# Altium PCB ZYNQ-HS-DEV-PCB.PcbDoc (part 12 of 13)
Units mm, origin at the board's own origin, x right, y up, seen from the top; angles counter-clockwise.
Board outline 125.73 x 111.93 mm, 10 copper layers (S1 (SIG), S2 (GND), S3 (SIG), S4 (GND), S5 (PWR), S6 (SIG), S7 (GND), S8 (SIG), S9 (GND), S10 (SIG)), stack 1.597 mm thick; 545 components, 400 nets, 2449 pads, 1577 vias.
Unrouted connection lines stored in the file: 309.
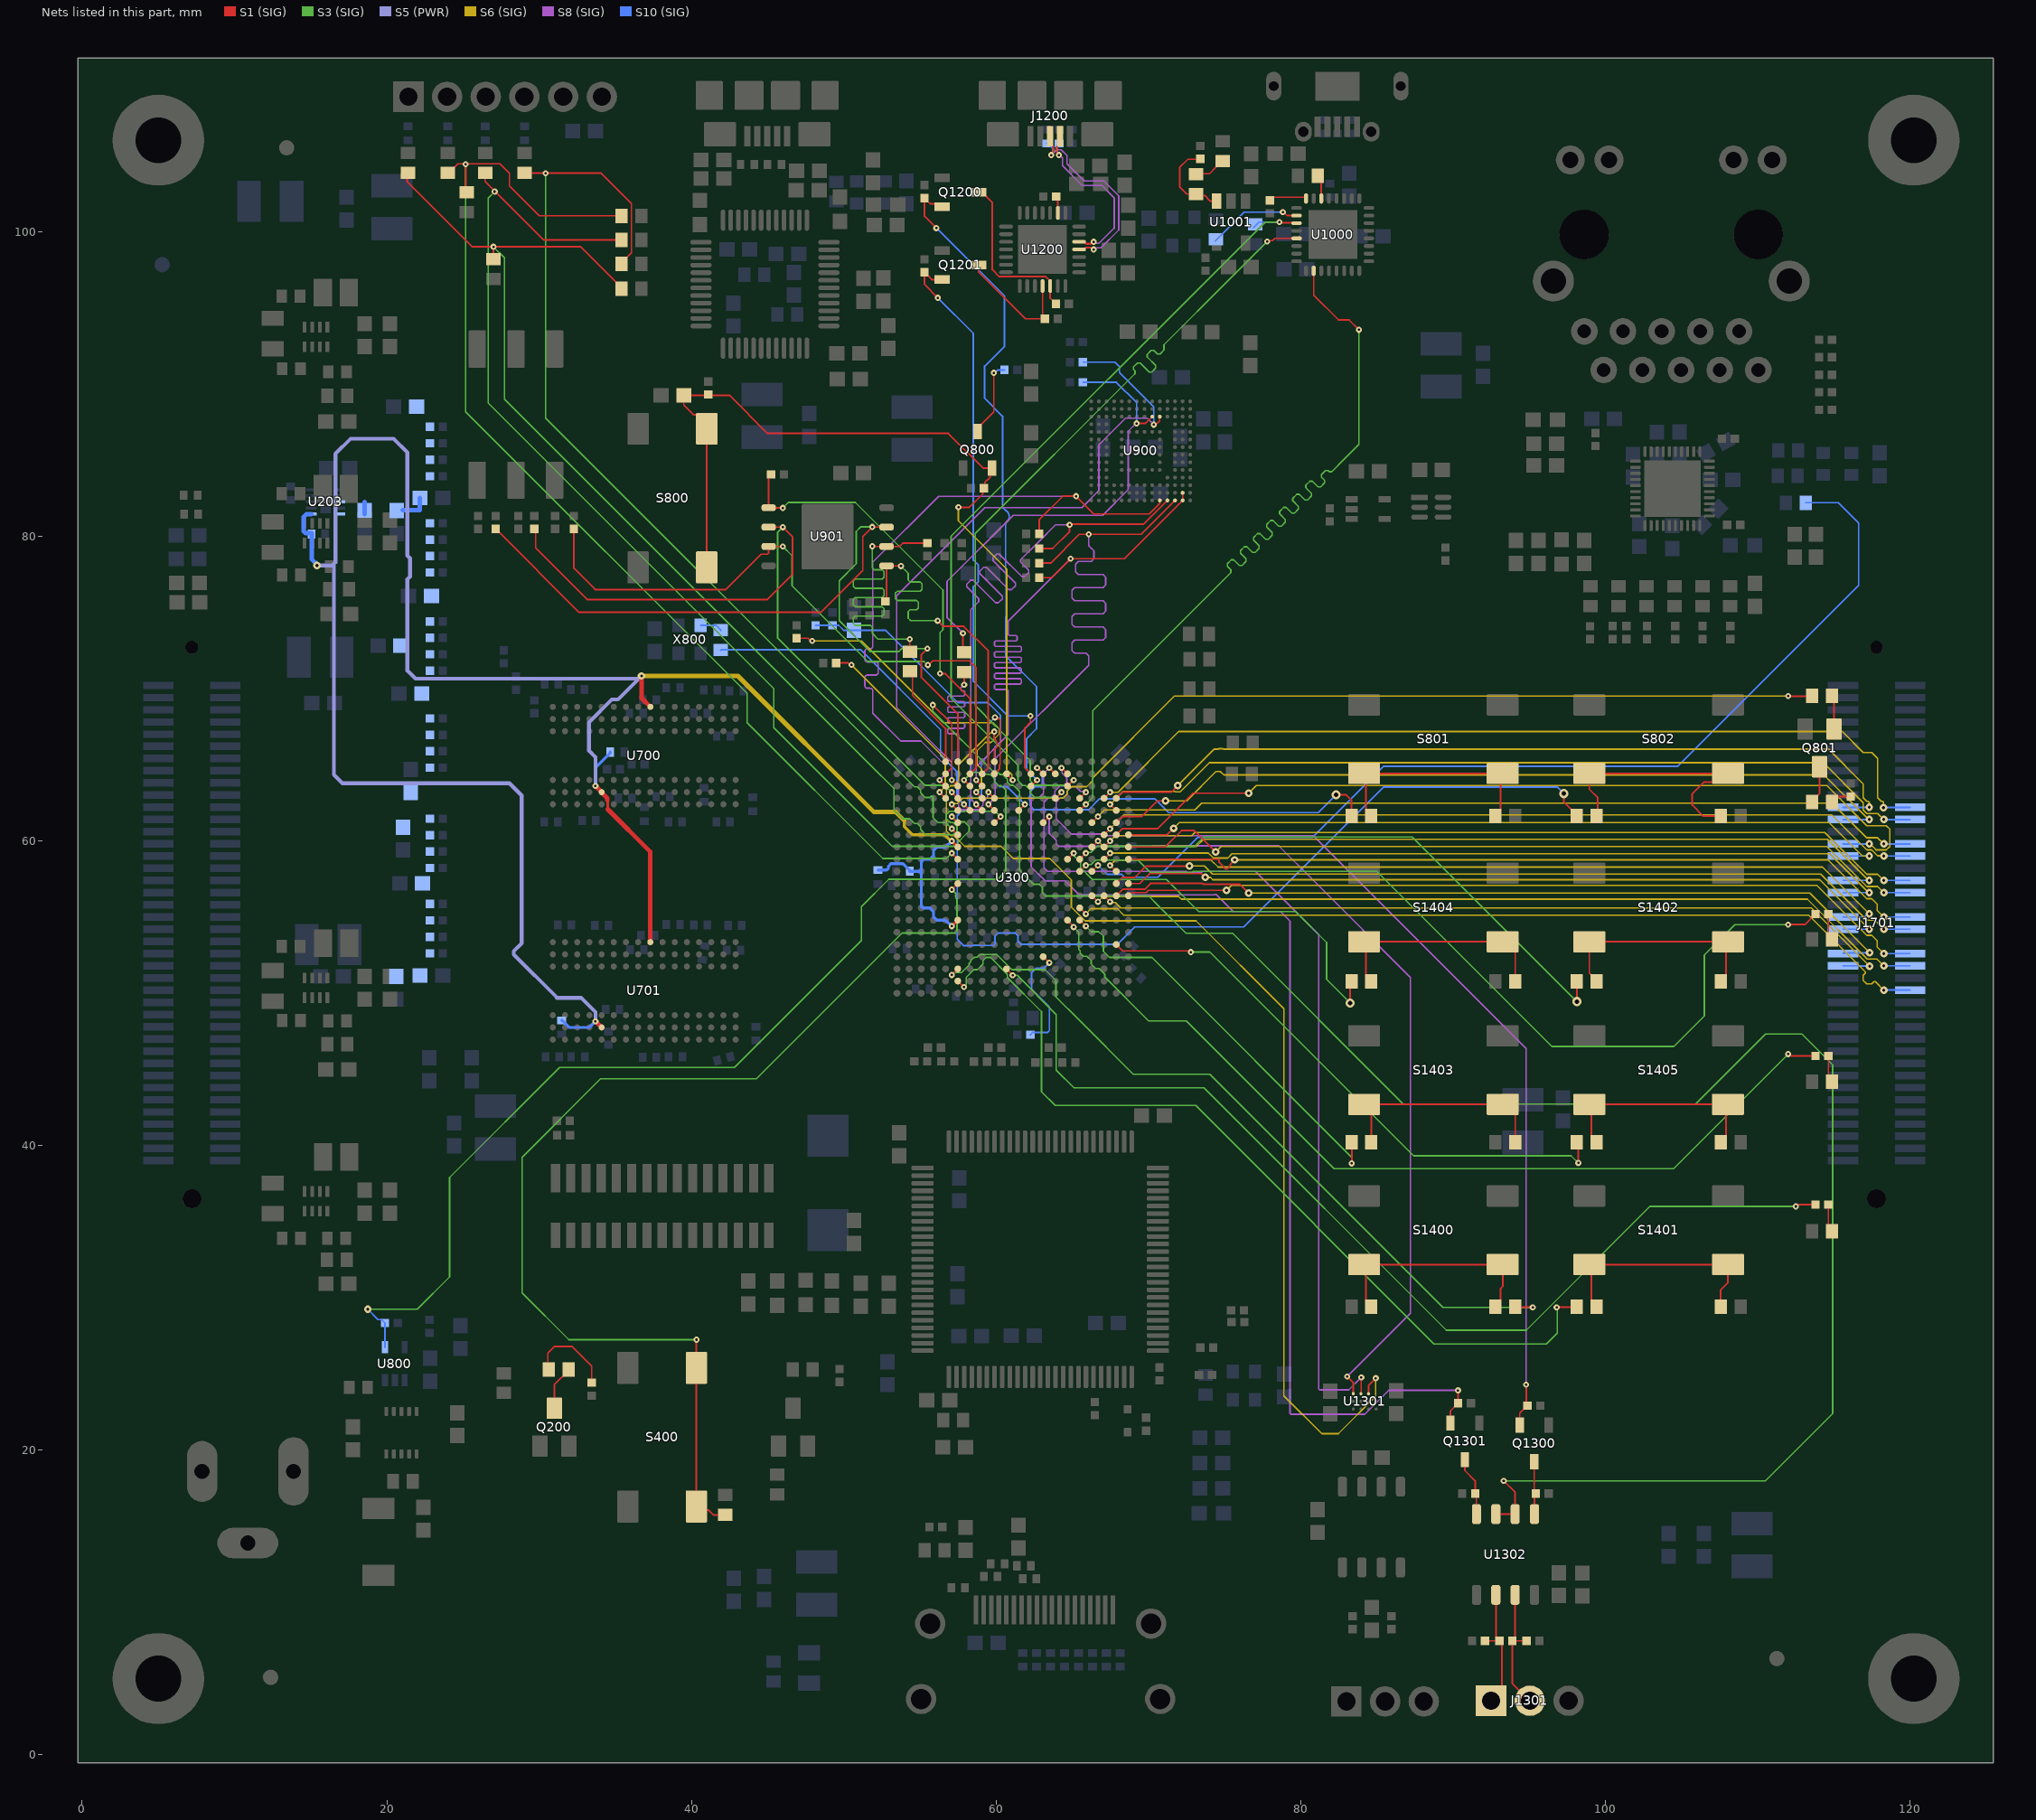
[diagram p19: the nets of this part, all layers, seen from the top]

## Via types
v1: diameter 0.4, hole 0.15, S1 (SIG) to S10 (SIG), tented both sides, 892 vias
v2: diameter 0.5, hole 0.2, S1 (SIG) to S10 (SIG), tented both sides, 231 vias
v3: diameter 0.6, hole 0.3, S1 (SIG) to S10 (SIG), tented both sides, 188 vias
v4: diameter 1, hole 0.5, S1 (SIG) to S10 (SIG), tented both sides, 158 vias
v5: diameter 0.5, hole 0.25, S1 (SIG) to S10 (SIG), tented both sides, 108 vias

## Nets (pads, with @x,y where several pads share a name; then routed paths per layer and width w, separated by ;. In a path a pad name is that pad's centre, name@x,y a point inside that pad or via, vN(x,y) a via of type N, cw(c..) or ccw(c..) an arc to the next point about the centre after c; other vN are vias at no path point) (continued)
OTG_NXT: U300.E16 U1000.2 | length 53.7
  S1 (SIG) w0.11: U300.E16@65.488,61.995 v1(65.888,62.395) ; U1000.2@80.85,97.4 80.85,95.825 82.475,94.2 83.175,94.2 v1(83.825,93.55)
  S3 (SIG) w0.1: v1(65.888,62.395) 66.338,62.845 66.338,68.538 75.379,77.579 75.414,77.614 75.414,77.786 75.178,78.021 75.178,78.193 75.436,78.451 75.608,78.451 75.976,78.084 76.148,78.084 76.406,78.342 76.406,78.514 76.038,78.881 76.038,79.053 76.296,79.311 76.468,79.311 76.836,78.943 77.008,78.943 77.266,79.201 77.266,79.373 76.898,79.741 76.898,79.913 77.156,80.171 77.328,80.171 77.696,79.803 77.868,79.803 78.126,80.061 78.126,80.233 77.758,80.601 77.758,80.773 78.016,81.031 78.188,81.031 78.556,80.663 78.728,80.663 78.985,80.921 78.985,81.093 78.618,81.461 78.618,81.633 78.876,81.891 79.048,81.891 79.415,81.523 79.587,81.523 79.845,81.781 79.845,81.953 79.478,82.321 79.478,82.493 79.736,82.75 79.908,82.75 80.275,82.383 80.447,82.383 80.705,82.641 80.705,82.813 80.338,83.18 80.338,83.352 80.595,83.61 80.767,83.61 81.135,83.243 81.307,83.243 81.565,83.501 81.565,83.673 81.365,83.873 81.365,84.045 81.623,84.303 81.795,84.303 81.863,84.235 82.035,84.235 82.874,85.074 83.825,86.025 v1(83.825,93.55)
OTG_OC_LED: D1003.1 R1004.1 | length 2.1
  S1 (SIG) w0.11: D1003.1@73.125,103.8 74.015,103.8 74.455,104.24 74.455,104.28 74.8,104.625 R1004.1@74.875,104.625
OTG_RBIAS: R1005.2 U1000.24 | length 2.5
  S1 (SIG) w0.11: R1005.2@77.975,102.05 78.175,102.25 80.285,102.25 80.35,102.185 U1000.24@80.35,102.175
OTG_RCLK: R1002.1 U1000.26 | length 6.2
  S1 (SIG) w0.11: v1(78.825,101.275) 78.891,101.275 79.116,101.05 79.7,101.05 U1000.26@79.713,101.037
  S10 (SIG) w0.11: R1002.1@74.376,99.375 76.276,101.275 v1(78.825,101.275)
OTG_RST: R1001.1 U300.D14 U1000.27 | length 55.1
  S1 (SIG) w0.11: U300.D14@63.888,62.795 v1(64.288,63.195) ; v1(78.6,100.625) 78.648,100.577 79.673,100.577 U1000.27@79.713,100.537
  S3 (SIG) w0.1: v1(64.288,63.195) 63.938,62.845 62.543,62.845 62.265,63.123 62.265,63.313 61.946,63.631 61.756,63.631 61.438,63.95 61.438,64.965 57.05,69.352 57.05,80 77.675,100.625 v1(78.6,100.625)
  S10 (SIG) w0.11: R1001.1@76.875,100.25 77.25,100.625 v1(78.6,100.625)
OTG_STP: U300.C15 U1000.29 | length 53.1
  S1 (SIG) w0.11: U300.C15@64.688,63.595 v1(65.088,63.995) ; v1(77.8,99.35) 77.856,99.405 78.151,99.405 78.295,99.55 U1000.29@79.7,99.55
  S3 (SIG) w0.1: v1(65.088,63.995) 64.738,63.645 62.543,63.645 62.238,63.95 62.238,65.262 60.225,67.275 60.225,67.32 60.02,67.525 59.975,67.525 58.625,68.875 58.625,80.175 69.088,90.637 69.123,90.673 69.123,90.845 69.024,90.944 69.024,91.116 69.282,91.373 69.454,91.373 70.048,90.779 70.22,90.779 70.478,91.037 70.478,91.209 69.922,91.766 69.922,91.938 70.18,92.196 70.352,92.196 70.585,91.963 70.757,91.963 71.015,92.221 71.015,92.393 71.015,92.564 75.338,96.887 v1(77.8,99.35)
OTG_SW_OCN: D1003.2 R1003.2 U1001.3 | length 5.7
  S1 (SIG) w0.11: R1003.2@73.4,104.775 73.367,104.742 72.592,104.742 72.05,104.2 72.05,102.925 72.509,102.466 D1003.2@73.125,102.466 73.225,102.365 73.7,102.365 74.066,102 U1001.3@74.475,102
OTG_VBUS: R1000.1 U1000.22 | length 1.6
  S1 (SIG) w0.11: R1000.1@81.125,103.675 81.35,103.45 U1000.22@81.35,102.175
PG_ALL_LA: D201.1 R210.1 | length 5.8
  S1 (SIG) w0.11: D201.1@30.625,25.3 30.575,25.35 30.575,26.375 31,26.8 32.175,26.8 33.45,25.525 R210.1@33.45,24.425
PG_ALL_LK: D201.2 Q200.3 | length 2.9
  S1 (SIG) w0.11: Q200.3@31,22.745 31,24.3 31.925,25.225 D201.2@31.925,25.3
PL13_BTN_1: R1403.2 U300.V6 | length 50.8
  S1 (SIG) w0.11: v1(57.088,51.195) U300.V6@57.488,51.595 ; R1403.2@94.083,29.408 94.116,29.375 v1(95.225,29.375)
  S3 (SIG) w0.1: v1(57.088,51.195) 57.238,51.345 57.733,51.345 58.238,51.85 58.238,51.971 58.338,52.071 58.338,52.14 58.543,52.345 58.612,52.345 58.627,52.36 58.748,52.36 58.933,52.545 60.043,52.545 61.043,51.545 63.213,51.545 63.925,50.833 63.925,49.755 65.48,48.2 69,44.68 74.026,44.68 89.331,29.375 v1(95.225,29.375)
PL13_BTN_1_SW: R1403.1 R1405.1 S1400.1 S1400.2 | length 15
  S1 (SIG) w0.11: R1405.1@84.633,29.408 84.288,29.753 84.288,32.053 S1400.1@84.158,32.183 S1400.2@93.258,32.183 93.258,30.749 93.128,30.619 93.128,29.753 R1403.1@92.783,29.408
PL13_BTN_2: R1404.2 U300.W6 | length 57.8
  S1 (SIG) w0.11: U300.W6@57.488,50.795 v1(57.888,50.395) ; v1(96.8,29.375) 98.088,29.375 R1404.2@98.122,29.408
  S3 (SIG) w0.1: v1(57.888,50.395) 58.038,50.545 58.038,51.04 58.543,51.545 58.765,51.545 59.138,51.917 59.138,52.14 59.343,52.345 59.633,52.345 60.738,51.24 60.738,51.02 62.975,48.783 62.975,48.2 62.975,43.525 63.875,42.625 73.1,42.625 88.75,26.975 96.125,26.975 96.834,27.684 96.834,29.341 v1(96.8,29.375)
PL13_BTN_2_SW: R1404.1 R1406.1 S1401.1 S1401.2 | length 15
  S1 (SIG) w0.11: R1404.1@99.422,29.408 99.077,29.753 99.077,32.053 S1401.1@98.947,32.183 S1401.2@108.047,32.183 108.047,30.995 107.572,30.52 R1406.1@107.572,29.408
PL13_LED: R1401.2 U300.V10 | length 68.5
  S1 (SIG) w0.11: U300.V10@60.688,51.595 60.688,51.58 61.088,51.18 v1(61.088,51.165) ; v1(112.5,36) 112.578,36 112.697,36.118 R1401.2@113.79,36.118
  S3 (SIG) w0.1: v1(61.088,51.165) 61.385,51.165 63.95,48.6 63.95,48.2 63.95,44.947 65.117,43.78 73.653,43.78 89.558,27.875 94.805,27.875 102.93,36 v1(112.5,36)
PL13_LED_A: D1400.1 R1401.1 | length 1.8
  S1 (SIG) w0.11: R1401.1@114.64,36.118 114.64,34.593 D1400.1@114.865,34.368
PL34_BTN_1: R1409.2 U300.P16 | length 26.7
  S1 (SIG) w0.11: U300.P16@65.488,54.795 v1(65.888,54.395) ; R1409.2@83.333,40.2 83.35,40.183 v1(83.35,38.825)
  S3 (SIG) w0.1: v1(65.888,54.395) 66.244,54.039 66.739,54.039 67.041,53.737 67.041,52.747 67.443,52.345 70.23,52.345 70.65,51.925 83.35,39.225 v1(83.35,38.825)
PL34_BTN_1_SW: R1409.1 R1414.1 S1403.1 S1403.2 | length 14.7
  S1 (SIG) w0.11: R1409.1@84.633,40.2 84.633,42.225 S1403.1@84.158,42.7 S1403.2@93.258,42.7 93.439,42.7 94.083,42.056 R1414.1@94.083,40.2
PL34_BTN_2: R1411.2 U300.T19 | length 37.7
  S1 (SIG) w0.11: U300.T19@67.888,53.195 68.307,52.775 72.567,52.775 72.589,52.754 72.721,52.754 v1(72.777,52.698) ; R1411.2@98.122,40.2 98.225,40.097 v1(98.225,38.85)
  S3 (SIG) w0.1: v1(72.777,52.698) 74.032,52.698 87.405,39.325 97.75,39.325 v1(98.225,38.85)
PL34_BTN_2_SW: R1411.1 R1415.1 S1405.1 S1405.2 | length 14.5
  S1 (SIG) w0.11: R1411.1@99.422,40.2 99.077,40.545 99.077,42.57 S1405.1@98.947,42.7 S1405.2@108.047,42.7 107.917,42.57 107.917,40.545 R1415.1@107.572,40.2
PL34_LED: R1407.2 U300.P15 | length 60.1
  S1 (SIG) w0.11: U300.P15@64.688,54.795 64.688,54.765 65.087,54.365 v1(65.087,54.335) ; v1(112,46) 112.078,46 112.203,45.875 R1407.2@113.79,45.875
  S3 (SIG) w0.1: v1(65.087,54.335) 65.431,53.992 65.431,52.869 65.511,52.789 65.511,52.624 65.716,52.419 65.959,52.419 66.244,52.133 66.244,51.917 66.536,51.625 66.752,51.625 67.138,51.24 67.138,51.05 70.012,48.175 72.483,48.175 82.183,38.475 104.475,38.475 v1(112,46)
PL34_LED_A: D1402.1 R1407.1 | length 1.8
  S1 (SIG) w0.11: R1407.1@114.64,45.875 114.64,44.425 D1402.1@114.865,44.2
PL34_PUDCB: R1400.2 U300.U13 | length 7.6
  S1 (SIG) w0.11: U300.U13@63.088,52.395 v1(63.488,51.995)
  S10 (SIG) w0.11: R1400.2@62.246,47.265 62.405,47.424 63.387,47.424 63.501,47.538 63.501,49.095 62.333,50.263 62.333,51.342 62.631,51.641 63.133,51.641 v1(63.488,51.995)
PL35_BTN_1: R1408.2 U300.J16 | length 39
  S1 (SIG) w0.11: U300.J16@65.488,58.795 v1(65.888,59.195) ; R1408.2@98.122,50.775 98.122,49.453 v3(98.125,49.45)
  S3 (SIG) w0.1: v1(65.888,59.195) 65.933,59.24 66.238,59.24 66.643,59.645 73.02,59.645 73.625,60.25 87.325,60.25 v3(98.125,49.45)
PL35_BTN_1_SW: R1408.1 R1412.1 S1402.1 S1402.2 | length 14.7
  S1 (SIG) w0.11: R1408.1@99.422,50.775 99.422,50.85 98.947,51.325 S1402.1@98.947,53.375 S1402.2@108.047,53.375 107.917,53.245 107.917,51.12 R1412.1@107.572,50.775
PL35_BTN_2: R1410.2 U300.J15 | length 26
  S1 (SIG) w0.11: U300.J15@64.688,58.795 v1(65.088,59.195) ; v3(83.25,49.35) 83.25,50.692 R1410.2@83.333,50.775
  S3 (SIG) w0.1: v1(65.088,59.195) 65.145,59.137 65.145,58.98 65.538,58.587 65.538,58.25 66.325,57.462 71.188,57.462 73.3,55.35 79.675,55.35 81.7,53.325 81.7,50.9 v3(83.25,49.35)
PL35_BTN_2_SW: R1410.1 R1413.1 S1404.1 S1404.2 | length 14.9
  S1 (SIG) w0.11: R1410.1@84.633,50.775 84.288,51.12 84.288,53.245 S1404.1@84.158,53.375 S1404.2@93.258,53.375 93.439,53.375 94.083,52.731 R1413.1@94.083,50.775
PL35_LED: R1402.2 U300.K16 | length 59.7
  S1 (SIG) w0.11: U300.K16@65.488,57.995 v1(65.888,58.395) ; v1(112,54.5) 113.094,54.5 R1402.2@113.79,55.196
  S3 (SIG) w0.1: v1(65.888,58.395) 65.933,58.44 66.238,58.44 66.543,58.745 69.304,58.745 70.104,57.945 72.866,57.945 72.921,58 84.986,58 96.486,46.5 104.5,46.5 106.5,48.5 106.5,52.5 108.5,54.5 v1(112,54.5)
PL35_LED_A: D1401.1 R1402.1 | length 1.8
  S1 (SIG) w0.11: R1402.1@114.64,55.196 114.64,53.746 D1401.1@114.865,53.521
PL_CLK_125: R1121.2 U300.K17 | length 66.9
  S1 (SIG) w0.11: U300.K17@66.288,57.995 v1(66.688,58.395)
  S10 (SIG) w0.11: v1(66.688,58.395) 67.28,57.802 68.241,57.802 68.436,57.607 70.607,57.607 73.225,60.225 80.775,60.225 85.45,64.9 104.75,64.9 116.625,76.775 116.625,80.875 115.3,82.2 R1121.2@113.15,82.2
PROGRAM_B_0: R403.1 S400.3 S400.4 U300.L6 | length 72.8
  S1 (SIG) w0.11: v1(40.325,27.25) S400.3@40.325,25.4 S400.4@40.325,16.3 40.569,16.056 41.126,16.056 41.432,15.75 R403.1@42.225,15.75 ; v1(57.088,56.795) U300.L6@57.488,57.195
  S3 (SIG) w0.1: v1(40.325,27.25) 31.95,27.25 28.875,30.325 28.875,39.225 34.025,44.375 44.26,44.375 51.9,52.015 53.83,53.945 57.291,53.945 57.438,54.091 57.438,56.14 57.35,56.227 57.35,56.532 v1(57.088,56.795)
PS_1V8MODE: R808.2 U300.D5 | length 12.7
  S1 (SIG) w0.11: R808.2@49.5,71.675 50.297,71.675 50.422,71.55 v1(50.5,71.55) ; v1(56.288,63.195) U300.D5@56.688,62.795
  S6 (SIG) w0.1: v1(50.5,71.55) 56.663,65.387 56.663,63.57 v1(56.288,63.195)
PS_3V3MODE: R807.2 U300.D8 | length 21.6
  S1 (SIG) w0.11: R807.2@46.9,73.3 47.672,73.3 47.847,73.125 v1(47.925,73.125) ; v1(58.688,63.195) U300.D8@59.088,62.795
  S6 (SIG) w0.1: v1(47.925,73.125) 51.155,73.125 56.53,67.75 59.795,67.75 60.225,67.32 60.225,67.03 59.663,66.468 59.3,66.468 58.738,65.905 58.738,65.028 59.038,64.728 59.038,63.545 v1(58.688,63.195)
PS_BTN_1: R821.2 U300.B13 | length 27.3
  S1 (SIG) w0.11: v1(62.688,64.795) U300.B13@63.088,64.395 ; v3(82.325,63.025) 82.95,63.025 83.333,62.642 R821.2@83.333,61.625
  S10 (SIG) w0.11: v1(62.688,64.795) 63.043,64.44 63.043,63.658 62.93,63.545 62.839,63.545 62.835,63.55 62.541,63.55 62.243,63.252 62.243,62.297 62.5,62.04 66.065,62.04 66.775,62.75 70.427,62.75 71.327,61.85 81.15,61.85 v3(82.325,63.025)
PS_BTN_2: R822.2 U300.B9 | length 67.6
  S1 (SIG) w0.11: U300.B9@59.888,64.395 60.23,64.738 60.23,65 60.268,65.037 60.268,67.943 60.166,68.045 59.98,68.045 v1(59.925,68.1) ; v3(97.275,63.1) 97.275,62.547 98.122,61.7 R822.2@98.122,61.625
  S10 (SIG) w0.11: v1(59.925,68.1) 59.488,67.663 59.488,65.607 59.02,65.139 59.02,64.164 59.043,64.142 59.043,63.048 58.796,62.801 58.336,62.801 58.271,62.737 58.271,62.276 57.957,61.962 57.753,61.962 57.445,61.654 57.445,53.535 57.855,53.125 58.516,53.125 58.541,53.15 58.835,53.15 58.851,53.133 59.842,53.133 59.925,53.216 59.925,53.734 60.141,53.95 61.235,53.95 61.443,53.742 61.443,53.388 61.617,53.214 67.979,53.214 69.116,54.35 76.267,54.35 85.447,63.53 96.845,63.53 v3(97.275,63.1)
PS_CLK: R817.2 U300.E7 | length 22.7
  S1 (SIG) w0.11: v1(57.888,62.395) U300.E7@58.288,61.995
  S10 (SIG) w0.11: R817.2@41.925,72.525 41.95,72.55 51.096,72.55 56.35,67.296 56.35,65.618 57.443,64.525 57.443,62.84 v1(57.888,62.395)
PS_COUT: R817.1 X800.3 | length 1.5
  S10 (SIG) w0.11: X800.3@40.6,74.15 41.6,74.15 R817.1@41.925,73.825
PS_LED: R820.2 U300.E6 | length 60.2
  S1 (SIG) w0.11: v1(57.088,62.395) U300.E6@57.488,61.995 ; v1(112,69.5) 113.54,69.5 R820.2@113.565,69.525
  S6 (SIG) w0.1: v1(57.088,62.395) 57.133,62.44 57.438,62.44 57.799,62.801 64.389,62.801 64.666,63.078 64.666,63.268 64.957,63.559 65.947,63.559 66.338,63.95 66.338,64.14 71.698,69.5 v1(112,69.5)
PS_LED_A: D800.1 R819.1 | length 1.4
  S1 (SIG) w0.11: D800.1@114.865,62.55 114.865,62.565 115.21,62.91 R819.1@116.101,62.91
PS_LED_G: Q801.1 R820.1 | length 2.3
  S1 (SIG) w0.11: R820.1@114.865,69.525 115.015,69.375 Q801.1@115.015,67.335
PS_LED_K: D800.2 Q801.3 | length 2.5
  S1 (SIG) w0.11: D800.2@113.565,62.55 113.565,62.625 114.065,63.125 Q801.3@114.065,64.865
PS_MIO_VREF: C803.1 R803.1 R804.1 U300.E11 | length 22.2
  S1 (SIG) w0.11: U300.E11@61.488,61.995 v1(61.888,62.395)
  S10 (SIG) w0.11: R803.1@48.15,74.148 R804.1@49.26,74.148 49.662,74.148 49.987,73.823 C803.1@50.669,73.823 52.74,73.823 57.488,69.075 59.452,69.075 60.28,68.247 60.28,66.517 59.938,66.175 59.938,64.445 59.933,64.44 59.933,63.848 60.231,63.55 60.733,63.55 v1(61.888,62.395)
PS_POR: R802.2 U300.C7 U800.4 | length 71.5
  S1 (SIG) w0.11: v1(57.888,63.995) U300.C7@58.288,63.595
  S3 (SIG) w0.1: v2(18.75,29.25) 22,29.25 24.125,31.375 24.125,37.9 31.35,45.125 42.825,45.125 51.15,53.45 51.15,55.675 52.95,57.475 60.116,57.475 60.175,57.534 60.175,57.55 60.638,58.013 60.638,63.34 60.358,63.62 60.168,63.62 59.888,63.9 59.888,64.09 59.633,64.345 59.53,64.345 59.5,64.375 59.175,64.375 59.05,64.5 58.393,64.5 v1(57.888,63.995)
  S10 (SIG) w0.11: v2(18.75,29.25) 19.43,28.57 19.655,28.57 R802.2@19.875,28.35 U800.4@19.875,26.75
PS_QSPI_IO0_M3: R912.2 U300.B8 U901.5 | length 25.6
  S1 (SIG) w0.11: R912.2@52.744,75.73 52.807,75.793 U901.5@52.807,78.058 52.818,78.047 53.743,78.047 v1(53.754,78.036) ; v1(56.16,74.45) 56.527,74.083 57.869,74.083 59.488,72.464 59.488,64.795 U300.B8@59.088,64.395
  S3 (SIG) w0.1: v1(53.754,78.036) 54.226,77.564 54.226,77.17 54.226,77.12 54.348,76.999 55.016,76.999 55.137,76.877 55.137,76.512 55.016,76.391 53.513,76.391 53.392,76.269 53.392,75.904 53.513,75.783 54.781,75.783 54.903,75.661 54.903,75.296 54.781,75.175 54.348,75.175 54.226,75.053 54.226,74.621 54.348,74.499 54.397,74.45 v1(56.16,74.45)
PS_QSPI_IO1_M1: R914.2 U300.D6 U901.2 | length 48.1
  S1 (SIG) w0.11: R914.2@29.537,80.341 29.693,80.341 29.775,80.259 29.775,79.225 33.159,75.841 44.991,75.841 46.625,77.475 46.625,79.965 v1(46.003,80.587) ; U901.2@45.067,80.598 v1@45.992,80.598 ; v1(57.088,63.195) U300.D6@57.488,62.795
  S3 (SIG) w0.11: v1(46.003,80.587) 45.648,80.232 45.648,73.332 55.341,63.64 56.643,63.64 v1(57.088,63.195)
PS_QSPI_IO2_M2: R915.2 U300.B7 U901.3 | length 42.8
  S1 (SIG) w0.11: R915.2@32.282,80.479 32.282,77.893 33.675,76.5 42.25,76.5 44.567,78.817 45.003,78.817 45.067,78.881 U901.3@45.067,79.328 v1@45.992,79.328 ; v1(55.521,71.544) 55.563,71.544 55.839,71.82 58.249,71.82 58.675,71.394 58.675,66.1 58.688,66.087 58.688,64.795 U300.B7@58.288,64.395
  S3 (SIG) w0.1: v1(46.003,79.317) 46.609,78.711 46.609,76.745 51.579,71.775 55.262,71.775 55.493,71.544 v1(55.521,71.544)
PS_QSPI_IO3_M0: R911.2 U300.A6 U901.7 | length 54.3
  S1 (SIG) w0.11: R911.2@27.15,80.479 32.629,75 48.5,75 51.25,77.75 51.25,79.988 v1(51.871,80.609) ; v1@51.882,80.598 51.888,80.603 52.802,80.603 U901.7@52.807,80.598 ; v1(55.483,72.617) 55.08,72.214 55.08,70.763 57.488,68.355 U300.A6@57.488,65.195
  S3 (SIG) w0.1: v1(51.871,80.609) 51.109,80.609 50.819,80.319 50.819,78.194 49.7,77.075 49.7,74.45 51.721,72.429 53.619,72.429 53.807,72.617 v1(55.483,72.617)
PS_QSPI_SCK_M4: R806.1 R913.2 U901.6 | length 24.1
  S1 (SIG) w0.11: v1@51.882,79.328 53.072,79.328 53.657,79.328 53.876,79.547 R913.2@55.495,79.547 ; v1(54.334,73.246) 54.334,72.421 R806.1@54.397,72.358
  S3 (SIG) w0.1: v1(51.871,79.339) 51.871,78.33 51.871,77.919 51.993,77.798 52.519,77.798 52.641,77.676 52.641,77.311 52.519,77.19 50.741,77.19 50.619,77.068 50.619,76.703 50.741,76.582 52.519,76.582 52.641,76.46 52.641,76.095 52.519,75.974 50.741,75.974 50.619,75.852 50.619,75.487 50.741,75.366 52.519,75.366 52.641,75.244 52.641,74.879 52.519,74.758 50.741,74.758 50.619,74.636 50.619,74.271 50.741,74.15 51.749,74.15 51.871,74.028 51.871,73.978 51.871,73.619 52.244,73.246 v1(54.334,73.246)
PS_QSPI_SS: R908.1 U300.A7 U901.1 | length 28.6
  S1 (SIG) w0.11: R908.1@45.22,84.057 45.067,83.904 U901.1@45.067,81.868 v1@45.992,81.868 ; v1(56.32,70.983) 56.34,70.963 56.685,70.963 58.288,69.36 U300.A7@58.288,65.195
  S3 (SIG) w0.1: v1(46.003,81.857) 46.358,82.212 50.763,82.212 56.51,76.465 56.51,73.86 56.32,73.67 v1(56.32,70.983)
PS_SD_CLK: R809.1 R900.1 U900.M6 | length 30.8
  S1 (SIG) w0.11: v1(57.825,73.625) 57.825,72.45 R809.1@57.9,72.375 ; v1(69.225,87.4) 69.796,87.4 U900.M6@70.246,87.85
  S8 (SIG) w0.1: v1(57.825,73.625) 56.775,74.675 56.775,77.025 61.125,81.375 66.991,81.375 68.675,83.059 68.675,86.899 69.176,87.4 v1(69.225,87.4)
  S10 (SIG) w0.11: R900.1@65.7,90.1 67.9,90.1 69.225,88.775 v1(69.225,87.4)
PS_SD_CMD: R901.1 U300.C6 U900.M5 | length 45.8
  S1 (SIG) w0.11: v1(57.088,63.995) U300.C6@57.488,63.595 ; v1(70.35,87.325) 70.405,87.38 70.555,87.38 70.735,87.56 70.735,87.839 U900.M5@70.746,87.85
  S8 (SIG) w0.1: v1(57.088,63.995) 57.088,65.137 55.525,66.7 53.475,68.75 53.475,76.1 59.25,81.875 65.625,81.875 66.748,82.998 66.748,85.997 68.501,87.75 69.925,87.75 v1(70.35,87.325)
  S10 (SIG) w0.11: R901.1@65.7,91.425 67.8,91.425 68.1,91.125 68.1,90.75 70.35,88.5 v1(70.35,87.325)
PS_SD_IO0: R905.1 U300.E9 U900.A3 | length 45.5
  S1 (SIG) w0.11: v1(59.488,62.395) U300.E9@59.888,61.995 ; R905.1@62.825,78.233 63.575,78.233 65.467,80.125 v1(66.075,80.125) 69.521,80.125 U900.A3@71.746,82.35
  S8 (SIG) w0.1: v1(59.488,62.395) 59.938,62.845 59.938,65.393 66.075,71.53 66.075,72.092 66.075,72.142 65.903,72.314 65.159,72.314 64.987,72.487 64.987,73.004 65.159,73.176 67.023,73.176 67.195,73.349 67.195,73.866 67.023,74.038 65.159,74.038 64.987,74.211 64.987,74.728 65.159,74.9 67.023,74.9 67.195,75.073 67.195,75.59 67.023,75.762 65.159,75.762 64.987,75.935 64.987,76.452 65.159,76.624 67.023,76.624 67.195,76.797 67.195,77.314 67.023,77.486 65.391,77.486 65.218,77.659 65.218,78.176 65.391,78.348 66.248,78.348 66.421,78.521 66.421,79.038 66.248,79.21 66.075,79.383 66.075,79.78 v1(66.075,80.125)
PS_SD_IO1: R904.1 U300.E8 U900.A4 | length 45.3
  S1 (SIG) w0.11: v1(58.688,62.395) U300.E8@59.088,61.995 ; R904.1@62.825,79.192 62.827,79.189 63.715,79.189 64.825,80.299 v1(64.825,80.75) 64.875,80.8 69.696,80.8 U900.A4@71.246,82.35
  S8 (SIG) w0.1: v1(58.688,62.395) 58.338,62.745 58.338,75.188 58.826,75.676 58.861,75.711 58.861,75.883 58.066,76.678 58.066,76.85 58.324,77.108 58.496,77.108 59.978,75.627 60.15,75.627 60.408,75.885 60.408,76.057 58.926,77.538 58.926,77.71 59.184,77.968 59.356,77.968 60.837,76.487 61.009,76.487 61.267,76.745 61.267,76.917 59.786,78.398 59.786,78.57 60.044,78.828 60.216,78.828 61.697,77.347 61.869,77.347 62.127,77.605 62.127,77.777 61.613,78.291 61.613,78.463 62.838,79.687 63.9,80.75 v1(64.825,80.75)
PS_SD_IO2: R903.1 U300.C5 U900.A5 | length 45.6
  S1 (SIG) w0.11: v1(56.288,63.995) U300.C5@56.688,63.595 ; R903.1@62.825,80.15 62.825,81.075 64.375,82.625 v1(65.25,82.625) 66.416,81.459 70.059,81.459 70.746,82.147 U900.A5@70.746,82.35
  S8 (SIG) w0.1: v1(56.288,63.995) 56.663,64.37 56.663,64.639 56.663,64.95 55.063,66.55 53.732,66.55 51.9,68.382 51.9,69.798 51.9,69.848 ccw(c51.728,69.848) 51.728,70.02 51.553,70.02 cw(c51.553,70.192) 51.381,70.192 51.381,70.71 cw(c51.553,70.71) 51.553,70.882 52.091,70.882 ccw(c52.091,71.054) 52.263,71.054 52.263,71.572 ccw(c52.091,71.572) 52.091,71.744 51.553,71.744 cw(c51.553,71.916) 51.381,71.916 51.381,72.434 cw(c51.553,72.434) 51.553,72.606 51.728,72.606 ccw(c51.728,72.778) 51.9,72.778 51.9,76.988 51.9,78.3 56.225,82.625 v1(65.25,82.625)
PS_SD_IO3: R902.1 U300.C8 U900.A2 U900.B2 | length 45.9
  S1 (SIG) w0.11: v1(58.688,63.995) U300.C8@59.088,63.595 ; R902.1@62.825,77.275 63.65,77.275 v1(64.9,78.525) 68.421,78.525 U900.A2@72.246,82.35 U900.B2@72.246,82.85
  S8 (SIG) w0.1: v1(58.688,63.995) 58.688,64.865 60.8,66.978 60.8,69.817 60.8,69.867 60.729,69.938 59.96,69.938 59.889,70.008 59.889,70.221 59.96,70.292 61.589,70.292 61.66,70.362 61.66,70.575 61.589,70.646 59.96,70.646 59.889,70.716 59.889,70.929 59.96,71 61.589,71 61.66,71.07 61.66,71.283 61.589,71.354 59.96,71.354 59.889,71.424 59.889,71.637 59.96,71.708 61.589,71.708 61.66,71.778 61.66,71.991 61.589,72.062 59.96,72.062 59.889,72.132 59.889,72.345 59.96,72.416 61.589,72.416 61.66,72.486 61.66,72.699 61.589,72.77 59.96,72.77 59.889,72.84 59.889,73.053 59.96,73.124 61.308,73.124 61.379,73.194 61.379,73.407 61.308,73.478 60.871,73.478 60.8,73.548 60.8,74.101 60.8,74.425 v1(64.9,78.525)
PS_SRST: C801.2 Q800.2 R800.1 R818.1 S800.3 S800.4 U300.B10 | length 58
  S1 (SIG) w0.11: S800.4@41,77.95 S800.3@41,87.05 41,87.331 40.356,87.975 40.135,87.975 39.5,88.61 C801.2@39.5,89.25 41.046,89.25 R800.1@41.1,89.304 41.154,89.25 42.5,89.25 45,86.75 56.867,86.75 59.142,84.475 Q800.2@59.725,84.475 59.608,84.358 59.608,83.874 59.259,83.526 59.259,83.209 R818.1@59.2,83.15 ; v1(57.525,81.9) 58.25,81.9 59.124,82.774 R818.1@59.124,83.074 ; U300.B10@60.688,64.395 v1(61.088,63.995)
  S6 (SIG) w0.1: v1(57.525,81.9) 57.525,81.015 60.7,77.84 60.7,64.687 61.043,64.345 61.043,64.04 v1(61.088,63.995)
PSBTN1SW: R821.1 R823.1 S801.1 S801.2 | length 15.1
  S1 (SIG) w0.11: R821.1@84.633,61.625 84.288,61.97 84.288,64.295 S801.1@84.158,64.425 S801.2@93.258,64.425 93.128,64.295 93.128,61.97 R823.1@92.783,61.625
PSBTN2SW: R822.1 R824.1 S802.1 S802.2 | length 18
  S1 (SIG) w0.11: R822.1@99.422,61.625 99.5,61.703 99.5,62.825 98.947,63.378 S802.1@98.947,64.425 S802.2@108.047,64.425 107.472,63.85 106.45,63.85 105.7,63.1 105.7,62.35 106.425,61.625 R824.1@107.572,61.625
QSPI_CLK: R806.2 U300.A5 | length 6.8
  S1 (SIG) w0.11: R806.2@54.397,71.058 54.511,70.944 54.511,69.55 56.688,67.374 U300.A5@56.688,65.195
RS485_A: J1301.1 R1304.1 R1305.2 U1302.6 | length 8.3
  S1 (SIG) w0.11: R1304.1@92.1,7.475 R1305.2@93.037,7.475 ; J1301.1@92.5,3.55 93.197,4.247 93.197,7.315 R1305.2@93.037,7.475 ; U1302.6@92.805,10.5 92.818,10.487 92.818,7.695 R1305.2@93.037,7.475
RS485_B: J1301.2 R1305.1 R1308.2 U1302.7 | length 8.4
  S1 (SIG) w0.11: U1302.7@94.075,10.5 94.075,7.662 R1305.1@93.888,7.475 ; R1308.2@94.825,7.475 R1305.1@93.888,7.475 ; J1301.2@95.04,3.55 93.888,4.703 R1305.1@93.888,7.475
RS485_IC_RX: Q1300.3 R1303.2 U1302.1 | length 3.5
  S1 (SIG) w0.11: Q1300.3@95.325,19.25 95.325,17.25 R1303.2@95.425,17.15 95.345,17.07 U1302.1@95.345,15.8
RS485_IC_TX: Q1301.3 R1307.2 U1302.4 | length 3.9
  S1 (SIG) w0.11: Q1301.3@90.775,19.375 90.775,18.663 91.45,17.988 R1307.2@91.45,17.15 91.535,17.065 U1302.4@91.535,15.8
RSCAN.CAN_RX: U300.B15 U1301.B3 | length 62.1
  S1 (SIG) w0.11: v1(64.288,64.795) U300.B15@64.688,64.395 ; U1301.B3@83.95,23.7 83.962,23.713 83.962,24.762 v1(83.975,24.775)
  S8 (SIG) w0.1: v1(64.288,64.795) 64.333,64.75 64.333,64.445 64.638,64.14 64.638,63.85 64.383,63.595 64.193,63.595 63.863,63.265 63.863,63.075 63.595,62.807 63.405,62.807 63.138,62.54 63.138,58.25 63.387,58 72.479,58 72.534,57.945 73.504,57.945 73.559,58 77.025,58 81.175,53.85 81.175,24.012 81.234,23.954 83.154,23.954 v1(83.975,24.775)
RSCAN.CAN_STB: U300.A9 U1301.C3 | length 74.1
  S1 (SIG) w0.11: v1(59.875,67.175) 59.875,66.686 60.025,66.536 60.025,66.126 59.888,65.989 U300.A9@59.888,65.195 ; U1301.C3@84.45,23.7 84.45,24.25 v1(84.925,24.725)
  S6 (SIG) w0.1: v1(59.875,67.175) 59.818,67.118 59.667,67.118 59.499,66.95 57.538,64.988 57.538,63.95 57.208,63.62 57.018,63.62 56.738,63.34 56.738,60.65 57.043,60.345 57.233,60.345 57.933,59.645 60.333,59.645 61.133,58.845 63.533,58.845 64.937,57.44 64.937,55.65 65.843,54.745 70.65,54.745 73.125,54.745 78.9,48.97 78.9,23.555 81.38,21.075 82.47,21.075 84.925,23.53 v1(84.925,24.725)
RSCAN.CAN_TX: U300.F13 U1301.A3 | length 58.7
  S1 (SIG) w0.11: U300.F13@63.088,61.195 v1(63.488,61.595) ; v1(83.05,24.825) 83.45,24.425 U1301.A3@83.45,23.7
  S8 (SIG) w0.1: v1(63.488,61.595) 63.488,60.49 63.938,60.04 63.938,59.812 64.105,59.645 70.265,59.645 70.295,59.675 78.556,59.675 80.863,57.368 87.2,51.031 87.2,28.975 v1(83.05,24.825)
RSCAN.RS485_DE: U300.B5 U1302.2 U1302.3 | length 131.6
  S1 (SIG) w0.11: v1(55.85,68.925) 57.088,67.687 57.088,64.795 U300.B5@56.688,64.395 ; U1302.3@92.805,15.8 U1302.2@94.075,15.8 94.075,17.225 v1(93.325,17.975)
  S3 (SIG) w0.1: v1(55.85,68.925) 55.85,68.503 59.787,64.566 60.059,64.566 60.272,64.353 60.424,64.353 60.738,64.04 60.738,63.85 60.943,63.645 61.133,63.645 61.538,63.24 61.538,58.07 62.462,57.145 62.833,57.145 63.038,56.94 63.038,56.57 63.232,56.375 70.019,56.375 70.65,55.744 72.469,53.925 75.525,53.925 86.725,42.725 105.925,42.725 110.525,47.325 112.9,47.325 114.925,45.3 114.925,22.4 110.5,17.975 v1(93.325,17.975)
RSCAN.RS485_RX: Q1300.2 R1302.2 U300.D16 | length 66.3
  S1 (SIG) w0.11: U300.D16@65.488,62.795 v1(65.888,63.195) ; Q1300.2@94.375,21.65 94.375,22.425 R1302.2@94.875,22.925 94.8,23 v1(94.8,24.3)
  S8 (SIG) w0.1: v1(65.888,63.195) 65.843,63.24 65.538,63.24 65.233,63.545 64.943,63.545 64.688,63.29 64.688,63.1 64.408,62.82 64.218,62.82 63.938,62.54 63.938,61.45 64.943,60.445 67.243,60.445 67.343,60.345 80.828,60.345 94.8,46.372 v1(94.8,24.3)
RSCAN.RS485_TX: Q1301.2 R1306.2 U300.B14 | length 72.7
  S1 (SIG) w0.11: v1(63.488,64.795) U300.B14@63.888,64.395 ; Q1301.2@89.825,21.775 89.825,22.575 R1306.2@90.325,23.075 v1(90.325,23.925)
  S8 (SIG) w0.1: v1(63.488,64.795) 63.11,64.417 63.11,63.122 62.789,62.801 62.352,62.801 62.294,62.742 62.294,58.294 63.223,57.365 64.54,57.365 65.46,56.445 74.32,56.445 74.359,56.484 74.441,56.484 75.575,55.35 78.672,55.35 79.3,54.722 79.3,22.409 79.359,22.35 84.208,22.35 85.783,23.925 v1(90.325,23.925)
SD_CLK_OUT: R809.2 U300.D9 | length 20.3
  S1 (SIG) w0.11: v1(57.9,70.25) R809.2@57.9,71.075 ; v1(59.488,63.195) U300.D9@59.888,62.795
  S8 (SIG) w0.1: v1(57.9,70.25) 57.753,70.103 57.679,70.029 57.679,69.929 57.75,69.858 57.865,69.858 57.936,69.787 57.936,69.575 57.865,69.504 56.89,69.504 56.82,69.433 56.82,69.221 56.89,69.15 57.865,69.15 57.936,69.079 57.936,68.867 57.865,68.796 56.89,68.796 56.82,68.725 56.82,68.513 56.89,68.442 57.865,68.442 57.936,68.371 57.936,68.159 57.865,68.088 56.89,68.088 56.82,68.017 56.82,67.805 56.89,67.734 57.865,67.734 57.936,67.663 57.936,67.451 57.865,67.38 56.89,67.38 56.82,67.309 56.82,67.097 56.89,67.026 57.467,67.026 57.538,66.955 57.538,66.905 57.538,62.25 57.743,62.045 58.833,62.045 59.131,62.344 59.131,62.534 59.443,62.845 59.443,63.15 v1(59.488,63.195)
SD_RST: Q800.3 R907.1 | length 5.1
  S1 (SIG) w0.11: Q800.3@58.775,86.875 58.775,87.095 59.85,88.17 v1(59.85,90.725)
  S10 (SIG) w0.11: v1(59.85,90.725) 59.919,90.725 60.11,90.916 R907.1@60.55,90.916
SE35.L3_35_N: J1701.23 U300.F19 | length 53.9
  S1 (SIG) w0.11: U300.F19@67.888,61.195 68.288,61.595 69.548,61.595 70.578,62.625 v2(71.125,62.625)
  S6 (SIG) w0.1: v2(71.125,62.625) 72.51,62.625 74.43,64.545 74.72,64.545 74.94,64.325 114.351,64.325 117.276,61.4 v2(117.325,61.4)
  S10 (SIG) w0.11: J1701.23@115.6,61.4 v2(117.325,61.4)
SE35.L3_35_P: J1701.21 U300.D19 | length 56.6
  S1 (SIG) w0.11: U300.D19@67.888,62.795 68.288,63.195 71.495,63.195 v2(71.925,63.625)
  S6 (SIG) w0.1: v2(71.925,63.625) 74.325,66.025 74.58,66.025 74.605,66.05 74.895,66.05 74.92,66.025 114.639,66.025 116.925,63.739 116.925,62.834 117.159,62.6 117.266,62.6 117.325,62.541 v2(117.325,62.2)
  S10 (SIG) w0.11: v2(117.325,62.2) J1701.21@115.6,62.2 115.625,62.175 v2@117.35,62.175
SE35.L5_35_N: J1701.29 U300.G20 | length 51.6
  S1 (SIG) w0.11: U300.G20@68.688,60.395 71.22,60.395 v2(71.65,60.825)
  S6 (SIG) w0.1: v2(71.65,60.825) 72.025,61.2 114.679,61.2 116.879,59 v2(117.325,59)
  S10 (SIG) w0.11: J1701.29@115.6,59 v2(117.325,59)
SE35.L5_35_P: J1701.27 U300.G19 | length 57.8
  S1 (SIG) w0.11: U300.G19@67.888,60.395 68.288,60.795 70.597,60.795 72.927,63.125 v2(76.575,63.125)
  S6 (SIG) w0.1: v2(76.575,63.125) 77.075,63.625 114.534,63.625 117.159,61 118.441,61 118.675,60.766 118.675,59.634 118.441,59.4 117.774,59.4 117.374,59.8 v2(117.325,59.8)
  S10 (SIG) w0.11: J1701.27@115.6,59.8 v2(117.325,59.8)
SE35.L6_35_N: J1701.35 U300.J18 | length 53.4
  S1 (SIG) w0.11: U300.J18@67.088,58.795 v1(67.488,59.195)
  S6 (SIG) w0.1: v1(67.488,59.195) 73.94,59.195 74.259,58.875 75.209,58.875 75.484,59.15 114.726,59.15 117.276,56.6 v2(117.325,56.6)
  S10 (SIG) w0.11: J1701.35@115.6,56.6 v2(117.325,56.6)
SE35.L6_35_P: J1701.33 U300.H17 | length 54.4
  S1 (SIG) w0.11: U300.H17@66.288,59.595 v1(66.688,59.995)
  S6 (SIG) w0.1: v1(66.688,59.995) 67.038,59.645 73.159,59.645 73.614,60.1 114.576,60.1 117.276,57.4 v2(117.325,57.4)
  S10 (SIG) w0.11: J1701.33@115.6,57.4 v2(117.325,57.4)
SE35.L7_35_N: J1701.41 U300.L20 | length 52.1
  S1 (SIG) w0.11: U300.L20@68.688,57.195 69.438,57.195 70.093,57.85 73.475,57.85 v2(73.725,57.6)
  S6 (SIG) w0.1: v2(73.725,57.6) 74.07,57.6 74.22,57.45 114.075,57.45 v2(117.325,54.2)
  S10 (SIG) w0.11: J1701.41@115.6,54.2 v2(117.325,54.2)
SE35.L7_35_P: J1701.39 U300.K19 | length 53.8
  S1 (SIG) w0.11: v1(67.488,58.395) U300.K19@67.888,57.995
  S6 (SIG) w0.1: v1(67.488,58.395) 67.838,58.745 74.107,58.745 74.576,58.275 114.25,58.275 v2(117.325,55.2)
  S10 (SIG) w0.11: J1701.39@115.6,55 117.019,55 117.219,55.2 v2(117.325,55.2)
SE35.L8_35_N: J1701.47 U300.M18 | length 53.9
  S1 (SIG) w0.11: U300.M18@67.088,56.395 v1(67.488,55.995)
  S6 (SIG) w0.1: v1(67.488,55.995) 67.533,55.95 67.838,55.95 68.193,55.595 113.53,55.595 v2(117.349,51.776)
  S10 (SIG) w0.11: J1701.47@115.6,51.8 116.752,51.8 116.777,51.776 v2(117.349,51.776)
SE35.L8_35_P: J1701.45 U300.M19 | length 53.5
  S1 (SIG) w0.11: U300.M19@67.888,56.395 68.308,56.815 69.75,56.815 70.135,57.2 73.552,57.2 73.597,57.155 75.995,57.155 v2(76.575,56.575)
  S6 (SIG) w0.1: v2(76.575,56.575) 113.425,56.575 v2(117.35,52.65)
  S10 (SIG) w0.11: J1701.45@115.6,52.6 115.65,52.65 v2(117.35,52.65)
SE35.L14_35_N: J1701.24 U300.E19 | length 56.1
  S1 (SIG) w0.11: v1(67.488,62.395) U300.E19@67.888,61.995
  S6 (SIG) w0.1: v1(67.488,62.395) 68.343,63.25 71.734,63.25 71.759,63.225 72.091,63.225 73.991,65.125 114.311,65.125 116.925,62.511 116.925,62.034 117.159,61.8 117.875,61.8 v2(118.275,61.4)
  S10 (SIG) w0.11: v2(118.275,61.4) J1701.24@120,61.4
SE35.L14_35_P: J1701.22 U300.D18 | length 60.3
  S1 (SIG) w0.11: U300.D18@67.088,62.795 v1(67.488,63.195)
  S6 (SIG) w0.1: v1(67.488,63.195) 68.005,63.195 71.985,67.175 115.55,67.175 116.925,65.8 117.491,65.8 117.875,65.416 117.875,62.834 118.109,62.6 118.191,62.6 118.25,62.541 v2(118.25,62.175)
  S10 (SIG) w0.11: v2(118.25,62.175) 119.975,62.175 J1701.22@120,62.2 v2@118.275,62.2
SE35.L16_35_N: J1701.30 U300.G18 | length 54.6
  S1 (SIG) w0.11: U300.G18@67.088,60.395 v1(67.488,60.795)
  S6 (SIG) w0.1: v1(67.488,60.795) 68.393,61.7 114.859,61.7 117.159,59.4 117.491,59.4 117.875,59.016 118.259,59.016 v2(118.275,59)
  S10 (SIG) w0.11: v2(118.275,59) J1701.30@120,59
SE35.L16_35_P: J1701.28 U300.F17 | length 55.4
  S1 (SIG) w0.11: U300.F17@66.288,61.195 v1(66.688,61.595)
  S6 (SIG) w0.1: v1(66.688,61.595) 67.118,62.025 73.05,62.025 73.5,62.475 114.884,62.475 117.159,60.2 117.875,60.2 v2(118.275,59.8)
  S10 (SIG) w0.11: v2(118.275,59.8) J1701.28@120,59.8
SE35.L17_35_N: J1701.36 U300.H20 | length 53.7
  S1 (SIG) w0.11: U300.H20@68.688,59.595 71.095,59.595 72.175,60.675 73.025,60.675 v2(74.425,59.275)
  S6 (SIG) w0.1: v2(74.425,59.275) 74.775,59.625 114.534,59.625 117.159,57 117.875,57 v2(118.275,56.6)
  S10 (SIG) w0.11: v2(118.275,56.6) J1701.36@120,56.6
SE35.L17_35_P: J1701.34 U300.H18 | length 54.6
  S1 (SIG) w0.11: U300.H18@67.088,59.595 v1(67.488,59.995)
  S6 (SIG) w0.1: v1(67.488,59.995) 67.838,60.345 72.845,60.345 73.05,60.55 114.409,60.55 117.159,57.8 117.875,57.8 v2(118.275,57.4)
  S10 (SIG) w0.11: v2(118.275,57.4) J1701.34@120,57.4
SE35.L18_35_N: J1701.42 U300.L19 | length 54.3
  S1 (SIG) w0.11: U300.L19@67.888,57.195 68.288,57.595 69.094,57.595 69.844,58.345 v2(72.7,58.345)
  S6 (SIG) w0.1: v2(72.7,58.345) 73.68,58.345 74.2,57.825 114.134,57.825 117.159,54.8 117.675,54.8 v2(118.275,54.2)
  S10 (SIG) w0.11: v2(118.275,54.2) J1701.42@120,54.2
SE35.L18_35_P: J1701.40 U300.J20 | length 53.8
  S1 (SIG) w0.11: U300.J20@68.688,58.795 74.555,58.795 74.645,58.705 74.645,58.586 75.081,58.15 75.172,58.15 75.374,58.352 75.374,58.44 75.65,58.716 v2(75.65,58.75)
  S6 (SIG) w0.1: v2(75.65,58.75) 114.609,58.75 117.159,56.2 117.491,56.2 117.845,55.846 117.845,55.43 v2(118.275,55)
  S10 (SIG) w0.11: v2(118.275,55) J1701.40@120,55
SE35.L19_35_N: J1701.48 U300.M17 | length 55.9
  S1 (SIG) w0.11: U300.M17@66.288,56.395 v1(66.688,55.995)
  S6 (SIG) w0.1: v1(66.688,55.995) 67.038,56.345 71.99,56.345 72.159,56.175 113.259,56.175 117.184,52.25 117.825,52.25 v2(118.275,51.8)
  S10 (SIG) w0.11: v2(118.275,51.8) J1701.48@120,51.8
SE35.L19_35_P: J1701.46 U300.M20 | length 53.7
  S1 (SIG) w0.11: U300.M20@68.688,56.395 68.712,56.395 68.922,56.605 69.837,56.605 69.982,56.75 v2(75.125,56.75)
  S6 (SIG) w0.1: v2(75.125,56.75) 75.455,57.08 113.88,57.08 117.159,53.8 117.491,53.8 117.845,53.446 117.845,53.03 v2(118.275,52.6)
  S10 (SIG) w0.11: v2(118.275,52.6) J1701.46@120,52.6
SE35.L20_35_P: J1701.52 U300.N16 | length 57.7
  S1 (SIG) w0.11: U300.N16@65.488,55.595 v1(65.888,55.195)
  S6 (SIG) w0.1: v1(65.888,55.195) 66.238,55.545 67.96,55.545 68.38,55.125 113.35,55.125 117.076,51.399 117.076,51.316 116.925,51.166 116.925,50.834 117.159,50.6 117.491,50.6 117.641,50.751 117.724,50.751 v2(118.275,50.2)
  S10 (SIG) w0.11: v2(118.275,50.2) J1701.52@120,50.2
TCK_0: R400.1 R500.2 R505.1 U300.J6 | length 77.6
  S1 (SIG) w0.11: R505.1@24,103.85 24.075,103.85 24.675,104.45 27.436,104.45 28.05,103.836 28.05,103 30.017,101.033 R500.2@35.4,101.033 ; v1(25.178,104.423) 25.178,102.646 R400.1@25.236,102.588 ; v1(57.088,59.195) U300.J6@57.488,58.795
  S3 (SIG) w0.1: v1(25.178,104.423) 25.178,88.172 43.65,69.7 43.65,67.755 52.566,58.839 56.731,58.839 v1(57.088,59.195)
TDI_0: R502.2 R507.1 U300.G6 | length 67.5
  S1 (SIG) w0.11: R507.1@29.05,103.85 34.047,103.85 36.061,101.835 36.061,98.611 35.4,97.95 R502.2@35.4,97.875 ; v1(57.088,60.795) U300.G6@57.488,60.395
  S3 (SIG) w0.1: v1(30.43,103.829) 30.43,87.757 51.725,66.462 54.643,63.545 54.833,63.545 55.038,63.34 55.038,63.15 55.343,62.845 55.633,62.845 55.718,62.93 55.801,62.93 55.86,62.872 55.86,61.528 56.186,61.201 56.681,61.201 v1(57.088,60.795)
TDO_0: R501.2 R506.1 U300.F6 | length 73
  S1 (SIG) w0.11: R506.1@26.45,103.85 26.45,103.285 30.293,99.442 R501.2@35.4,99.442 ; v1(57.088,61.595) U300.F6@57.488,61.195
  S3 (SIG) w0.1: v1(27.085,102.624) 26.65,102.189 26.65,88.745 45.405,69.99 45.405,67.425 51.9,60.93 53.185,59.645 57.233,59.645 58.238,60.65 58.238,60.94 57.939,61.239 57.444,61.239 v1(57.088,61.595)
TMS_0: R401.1 R503.2 R509.1 U300.F9 | length 77.2
  S1 (SIG) w0.11: R509.1@21.4,103.85 21.325,103.775 21.325,103.285 25.61,99 v1(27,99) ; R401.1@27,98.176 v1(27,99) ; R503.2@35.4,96.258 35.4,96.333 32.733,99 v1(27,99) ; U300.F9@59.888,61.195 v1(60.288,61.595)
  S3 (SIG) w0.1: v1(27,99) 27.725,98.275 27.725,89 51.725,65 53.29,63.435 53.29,62.015 53.856,61.45 54.338,61.45 54.543,61.245 54.643,61.145 54.833,61.145 55.038,60.94 55.038,60.75 55.388,60.4 57.188,60.4 57.438,60.65 57.438,60.94 57.183,61.195 56.993,61.195 56.738,61.45 56.738,61.74 56.943,61.945 59.938,61.945 v1(60.288,61.595)
UART_IC_RX: Q1201.3 R1203.2 U1200.25 | length 8.3
  S1 (SIG) w0.11: Q1201.3@58.85,97.8 58.85,97.355 61.93,94.275 R1203.2@63.2,94.275 63.05,94.425 U1200.25@63.05,96.425
UART_IC_TX: Q1200.3 R1200.2 U1200.26 | length 11.3
  S1 (SIG) w0.11: Q1200.3@58.85,102.575 59.07,102.575 59.752,101.893 59.752,97.502 60.209,97.045 63.255,97.045 63.55,96.75 63.55,95.625 R1200.2@63.925,95.25
USB_UART_D_N: D1201.2 J1200.2 U1200.5 | length 12.2
  S1 (SIG) w0.121: v1(64.125,105.025) 64.125,105.1 63.999,105.226 63.999,105.587 64.2,105.787 J1200.2@64.2,106.262 ; U1200.5@65.45,99.325 65.784,99.325 65.91,99.199 66.199,99.199 66.325,99.325 v1(66.4,99.325)
  S8 (SIG) w0.1: v1(64.125,105.025) 64.163,105.025 64.35,104.838 64.35,104.325 65.651,103.025 66.95,103.025 67.75,102.225 67.75,100.225 66.75,99.225 66.581,99.225 66.481,99.325 v1(66.4,99.325)
  S10 (SIG) w0.121: v1(64.125,105.025) 64.125,105.1 63.999,105.226 63.999,105.645 D1201.2@64.147,105.793
USB_UART_D_P: D1202.2 J1200.3 U1200.4 | length 14
  S1 (SIG) w0.121: J1200.3@63.55,106.262 63.55,105.787 63.751,105.587 63.751,105.226 63.625,105.1 v1(63.625,105.025) ; U1200.4@65.45,98.825 65.784,98.825 65.91,98.951 66.199,98.951 66.325,98.825 v1(66.4,98.825)
  S8 (SIG) w0.1: v1(63.625,105.025) 63.975,105.375 64.27,105.375 64.65,104.995 64.65,104.45 65.775,103.325 67.075,103.325 68.05,102.349 68.05,100.101 66.874,98.925 66.581,98.925 66.481,98.825 v1(66.4,98.825)
  S10 (SIG) w0.121: D1202.2@63.329,105.793 63.379,105.793 63.751,105.421 63.751,105.226 63.625,105.1 v1(63.625,105.025)
USB_UART_RST: R1202.1 U1200.9 | length 1.1
  S1 (SIG) w0.11: R1202.1@63.95,102.3 64.05,102.2 U1200.9@64.05,101.225
USB_UART_RX: Q1200.2 R1201.2 U300.C12 | length 45
  S1 (SIG) w0.11: v1(56.075,100.225) 55.3,101 R1201.2@55.3,102.2 55.676,101.824 56.251,101.824 Q1200.2@56.45,101.625 ; U300.C12@62.288,63.595 v1(62.688,63.995)
  S10 (SIG) w0.11: v1(56.075,100.225) 60.553,95.747 60.553,92.475 59.25,91.172 59.25,89.05 60.425,87.875 60.425,81.908 60.657,81.675 ; 60.658,81.675 60.689,81.65 cw(c60.407,81.293) 60.691,80.938 60.687,80.934 60.654,80.901 60.654,80.798 60.625,80.769 60.655,74.827 cw(c60.2,74.825) 60.625,74.663 60.625,72.15 60.657,72.118 62.652,70.123 62.652,67.357 61.995,66.7 61.995,64.687 v1(62.688,63.995)
USB_UART_TX: Q1201.2 R1204.2 U300.B12 | length 38.6
  S1 (SIG) w0.11: v1(56.175,95.65) 55.3,96.525 R1204.2@55.3,97.325 55.775,96.85 Q1201.2@56.45,96.85 ; v1(62.25,68.2) 62.25,67.775 61.888,67.413 61.888,64.795 U300.B12@62.288,64.395
  S10 (SIG) w0.11: v1(56.175,95.65) 58.5,93.325 58.5,78.428 58.83,78.098 58.83,77.019 58.5,76.689 58.5,70.475 60.775,68.2 v1(62.25,68.2)
VTT: C212.2 C602.2 C603.2 C604.2 C605.2 C606.2 C607.2 C608.2 C609.2 C610.2 C611.2 C612.2 R600.1 R601.1 R602.1 R603.1 R604.1 R605.1 R606.1 R607.1 R608.1 R609.1 R610.1 R611.1 R612.1 R613.1 R614.1 R615.1 R616.1 R617.1 R618.1 R619.1 R620.1 R621.1 R622.1 R623.1 U203.3 U203.5 | length 2.7
  S10 (SIG) w0.3: C212.2@18.55,81.45 C212.2@18.55,81.7 18.55,82.25 ; C604.2@21.05,81.7 22.175,81.7 C607.2@22.175,82.506
VTT_REF: C213.2 C600.2 C601.2 C712.2 C713.2 U203.6 U300.H6 U300.P6 U700.H1 U700.M8 U701.H1 U701.M8 | length 159.9
  S1 (SIG) w0.2: 34.475,62.675 34.475,62.591 34.5,62.566 34.5,62.075 ; v1(57.088,54.395) U300.P6@57.488,54.795 ; v1(57.088,59.995) U300.H6@57.488,59.595
  S1 (SIG) w0.3: v1(33.7,48.15) U701.M8@34.1,47.75 ; v1(33.7,63.6) U700.M8@34.1,63.2 34.1,63.173 34.475,62.798 34.475,62.675 ; 34.5,62.075 37.3,59.275 U701.H1@37.3,53.35 ; v2(36.725,70.825) 36.725,69.375 U700.H1@37.3,68.8
  S5 (PWR) w0.254: v2(15.425,78.075) 16.533,78.075 16.533,64.338 17.096,63.775 28.05,63.775 28.85,62.975 28.85,53.271 28.33,52.751 28.33,52.541 31.173,49.698 32.756,49.698 33.7,48.754 v1(33.7,48.15) ; 16.425,78.075 16.625,78.275 16.625,85.4 17.625,86.4 20.45,86.4 21.35,85.5 21.35,78.725 21.527,78.548 21.527,77.352 21.35,77.175 21.35,71.174 21.876,70.648 36.548,70.648 ; v1(33.7,63.6) 33.7,65.495 33.273,65.922 33.273,67.777 34.774,69.277 35.177,69.277 36.548,70.648 ; v2(36.725,70.825) 36.548,70.648
  S6 (SIG) w0.2: 53.975,61.325 53.975,60.942 54.522,60.395 56.453,60.395 56.463,60.405 56.629,60.405 57.039,59.995 v1(57.088,59.995)
  S6 (SIG) w0.3: v2(36.725,70.825) 43.05,70.825 51.988,61.887 53.413,61.887 53.975,61.325
  S10 (SIG) w0.2: C712.2@31.475,48.2 31.525,48.2 31.975,47.75 33.3,47.75 v1(33.7,48.15) ; v1(33.7,63.6) 33.7,64.8 34.675,65.775 C713.2@34.675,65.825 ; C601.2@52.25,58.075 52.808,58.075 52.925,58.192 52.925,58.333 53.092,58.5 53.875,58.5 54.325,58.05 C600.2@54.325,58 54.996,58 55.088,57.909 ; v1(57.088,54.395) 56.688,54.795 56.122,54.795 55.946,54.971 55.946,54.979 55.888,55.037 55.888,55.36 55.653,55.595 55.205,55.595 55.088,55.712 55.088,57.909 ; v1(57.088,59.995) 56.688,59.595 56.122,59.595 55.888,59.36 55.888,59.012 55.67,58.795 55.22,58.795 55.1,58.675 55.1,58.573 55.088,58.56 55.088,57.909
  S10 (SIG) w0.3: U203.6@15.035,81.45 14.726,81.45 14.55,81.274 14.55,80.326 14.676,80.2 15.06,80.2 C213.2@15.06,80.15 15.06,78.494 15.425,78.129 v2(15.425,78.075)
pads on no net: FID200.FID FID201.FID FID202.FID FID203.FID FID204.FID FID205.FID J500.4 J1100.1 J1100.MH J1200.4 J1700.16 J1700.18 J1700.76 J1700.78 J1700.MH J1701.51 J1701.53 J1701.54 J1701.57 J1701.58 J1701.59 J1701.60 J1701.63 J1701.64 J1701.65 J1701.66 J1701.69 J1701.70 J1701.71 J1701.72 J1701.75 J1701.76 J1701.77 J1701.78 J1701.MH U201.9 U300.A20 U300.B19 U300.B20 U300.C20 U300.D20 U300.E17 U300.E18 U300.F16 U300.F20 U300.G14 U300.G15 U300.G17 U300.H15 U300.H16 U300.J14 U300.J19 U300.K14 U300.K18 U300.L14 U300.L15 U300.L16 U300.L17 U300.M14 U300.M15 U300.N15 U300.R19 U300.T9 U300.U10 U300.U14 U300.V5 U300.V7 U300.V11 U300.V13 U300.Y12 U500.2 U500.17 U500.18 U500.19 U500.20 U500.21 U500.25 U500.26 U500.27 U500.28 U500.29 U500.30 U500.31 U500.32 U500.33 U500.43 U500.44 U500.45 U700.J1 U700.J9 U700.L1 U700.L9 U700.M7 U701.J1 U701.J9 U701.L1 U701.L9 U701.M7 U800.1 U802.1 U802.6 U803.1 U900.A1 U900.A7 U900.A8 U900.A9 U900.A10 U900.A11 U900.A12 U900.A13 U900.A14 U900.B1 U900.B3 U900.B4 U900.B5 U900.B6 U900.B7 U900.B8 U900.B9 U900.B10 U900.B11 U900.B12 U900.B13 U900.B14 U900.C1 U900.C3 U900.C5 U900.C7 U900.C8 U900.C9 U900.C10 U900.C11 U900.C12 U900.C13 U900.C14 U900.D2 U900.D3 U900.D4 U900.D12 U900.D13 U900.D14 U900.E1 U900.E2 U900.E3 U900.E5 U900.E8 U900.E9 U900.E10 U900.E12 U900.E13 U900.E14 U900.F1 U900.F2 U900.F3 U900.F10 U900.F12 U900.F13 U900.F14 U900.G1 U900.G2 U900.G3 U900.G10 U900.G12 U900.G13 U900.G14 U900.H1 U900.H2 U900.H3 U900.H5 U900.H12 U900.H13 U900.H14 U900.J1 U900.J2 U900.J3 U900.J12 U900.J13 U900.J14 U900.K1 U900.K2 U900.K3 U900.K6 U900.K7 U900.K10 U900.K12 U900.K13 U900.K14 U900.L1 U900.L2 U900.L3 U900.L12 U900.L13 U900.L14 U900.M1 U900.M2 U900.M3 U900.M7 U900.M8 U900.M9 U900.M10 U900.M11 U900.M12 U900.M13 U900.M14 U900.N1 U900.N3 U900.N6 U900.N7 U900.N8 U900.N9 U900.N10 U900.N11 U900.N12 U900.N13 U900.N14 U900.P2 U900.P7 U900.P8 U900.P9 U900.P10 U900.P11 U900.P12 U900.P13 U900.P14 U1000.12 U1000.15 U1000.16 U1000.25 U1200.1 U1200.2 U1200.10 U1200.11 U1200.12 U1200.13 U1200.14 U1200.15 U1200.16 U1200.17 U1200.18 U1200.19 U1200.20 U1200.21 U1200.22 U1200.23 U1200.24 U1200.27 U1200.28 U1301.D1

## Polygon pours and split planes (outlines as drawn)
CHASSIS on S10 (SIG) "S10 (SIG)-CHASSIS" (solid, pour order 429): 125.231,-0.01 125.259,-0.01 125.259,2.99 125.231,2.99 125.231,107.968 125.232,107.968 125.232,110.968 85.675,110.968 85.675,108.748 83.85,108.748 83.85,110.968 80.95,110.968 80.95,108.748 79.125,108.748 79.125,110.968 36,110.968 36,107.968 116,107.968 116,104.74 ccw(c118.54,104.74) 118.54,102.2 122.231,102.2 122.231,9.25 118.99,9.25 ccw(c118.99,6.71) 116.45,6.71 116.45,2.99 49.25,2.99 49.25,5.425 44.625,5.425 44.6,5.3 44.6,2.99 9.25,2.99 9.25,6.26 ccw(c6.71,6.26) 6.71,8.8 3.001,8.8 3.001,101.75 6.26,101.75 ccw(c6.26,104.29) 8.8,104.29 8.8,108 19,108 19,111 0,111 0,108 0.001,108 0.001,2.99 0,2.99 0,-0.01 122.231,-0.01 122.231,-0.042 125.231,-0.042
+1V35 on S10 (SIG) "+1V35_L10_P305" (solid, pour order 305): 16.875,86.4 19.975,86.4 19.975,83.85 16.875,83.85 16.875,86.35
VTT on S10 (SIG) "S10 (SIG)-VTT" (solid, pour order 307): 19.7,50.175 23.225,50.175 23.225,88.82 21.075,88.82 21.075,82.925 17.675,82.925 17.675,82.35 16.575,82.35 16.575,81.35 17.675,81.35 17.675,80.825 21.075,80.825 21.075,52.263 19.7,52.263
GND on S10 (SIG) "GND_L10_P306" (solid, pour order 306): 61.05,4.8 61.05,5.9 61.4,6.25 68.7,6.25 69.025,5.925 69.025,4.775 68.8,4.55 61.3,4.55
GND on S9 (GND) "S9 (GND)-GND" (solid, pour order 445): 0,0 125.25,0 125.25,111 85.675,111 85.675,108.748 83.85,108.748 83.85,111 80.95,111 80.95,108.748 79.125,108.748 79.125,111 0,111
CHASSIS on S9 (GND) "S9 (GND)-CHASSIS" (solid, pour order 425): 125.231,-0.01 125.259,-0.01 125.259,2.99 125.231,2.99 125.231,107.968 125.232,107.968 125.232,110.968 85.648,110.968 85.648,108.748 83.85,108.748 83.85,110.968 80.95,110.968 80.95,108.748 79.152,108.748 79.152,110.968 36,110.968 36,107.968 116,107.968 116,104.74 ccw(c118.54,104.74) 118.54,102.2 122.231,102.2 122.231,9.25 118.99,9.25 ccw(c118.99,6.71) 116.45,6.71 116.45,2.99 9.25,2.99 9.25,6.26 ccw(c6.71,6.26) 6.71,8.8 3.001,8.8 3.001,101.75 6.26,101.75 ccw(c6.26,104.29) 8.8,104.29 8.8,108 19,108 19,111 0,111 0,108 0.001,108 0.001,2.99 0,2.99 0,-0.01 122.231,-0.01 122.231,-0.042 125.231,-0.042
CHASSIS on S1 (SIG) "S1 (SIG)-CHASSIS" (solid, pour order 383): 125.231,-0.01 125.259,-0.01 125.259,2.99 125.231,2.99 125.231,107.968 125.232,107.968 125.232,110.968 85.675,110.968 85.675,108.748 83.85,108.748 83.85,110.968 80.95,110.968 80.95,108.748 79.125,108.748 79.125,110.968 36,110.968 36,107.968 40.841,107.968 40.841,105.587 42.925,105.587 42.925,107.968 47.041,107.968 47.041,105.587 49.125,105.587 49.125,107.968 59.4,107.968 59.4,106.387 61.5,106.387 61.5,107.968 65.6,107.968 65.6,106.387 67.7,106.387 67.7,107.968 116,107.968 116,104.74 ccw(c118.54,104.74) 118.54,102.2 122.231,102.2 122.231,9.25 118.99,9.25 ccw(c118.99,6.71) 116.45,6.71 116.45,2.99 9.25,2.99 9.25,6.26 ccw(c6.71,6.26) 6.71,8.8 3.001,8.8 3.001,101.75 6.26,101.75 ccw(c6.26,104.29) 8.8,104.29 8.8,108 19,108 19,111 0,111 0,108 0.001,108 0.001,2.99 0,2.99 0,-0.01 122.231,-0.01 122.231,-0.042 125.231,-0.042
+VUSB_OTG on S1 (SIG) "+VUSB_OTG_L01_P280" (solid, pour order 280): 80.8,107.476 80.8,106.002 cw(c80.374,106.002) 80.675,105.7 cw(c80.597,105.778) 80.597,105.668 79.331,105.668 ccw(c79.331,105.576) 79.266,105.641 79.225,105.6 79.225,104.406 cw(c78.969,104.406) 79.15,104.225 cw(c79.09,104.285) 79.09,104.2 76.175,104.2 ccw(c76.658,103.717) 75.975,103.717 75.975,101.445 ccw(c76.354,101.61) 76.203,101.225 76.55,101.225 ccw(c76.525,101.406) 76.67,101.295 76.775,101.4 76.775,102.519 cw(c77.031,102.519) 76.85,102.7 cw(c77.272,102.278) 77.273,102.875 80.2,102.875 ccw(c79.355,103.72) 80.55,103.72 80.55,104.579 cw(c80.721,104.579) 80.6,104.7 cw(c80.962,104.338) 80.962,104.85 81.1,104.85 ccw(c80.348,105.602) 81.412,105.602 81.412,107.476 ccw(c81.202,107.476) 81.35,107.625 ccw(c81.29,107.565) 81.29,107.65 80.9,107.65 ccw(c81.024,107.463)
1V35_SW on S1 (SIG) "1V35_SW_L01_P276" (solid, pour order 276): 15.8,80.461 15.8,82.161 16.5,82.161 16.5,84.061 15.1,84.061 15.1,82.161 15.4,82.161 15.4,80.461
+5V on S1 (SIG) "S1 (SIG)-+5V" (solid, pour order 291): 9.85,25.15 20.6,25.15 cw(c20.6,25.025) 20.725,25.025 20.725,22.389 ccw(c20.939,22.389) 20.939,22.175 23.7,22.175 cw(c23.7,22) 23.875,22 ccw(c24.275,22) 24.275,21.6 25.226,21.6 ccw(c25.226,22.024) 25.65,22.024 25.65,25.85 ccw(c25.2,25.85) 25.2,26.3 22.7,26.3 cw(c22.7,26.725) 22.275,26.725 22.275,28.225 ccw(c21.675,28.225) 21.675,28.825 15.925,28.825 cw(c15.925,29.925) 14.825,29.925 14.825,97.025 ccw(c13.55,97.025) 13.55,98.3 10.375,98.3 ccw(c10.375,97.125) 9.2,97.125 9.2,69.775 3.775,69.775 3.775,65.7 9.2,65.7 9.2,25.8 ccw(c9.85,25.8)
+PWRIN on S1 (SIG) "+PWRIN_L01_P290" (solid, pour order 290): 20.25,13.875 18.55,13.875 cw(c18.55,14.85) 17.575,14.85 17.575,14.975 ccw(c16,14.975) 16.633,16.417 cw(c16.633,17.175) 15.875,17.175 15.875,20.775 ccw(c14.55,20.775) 14.55,22.1 12.975,22.1 ccw(c12.975,20.975) 11.85,20.975 11.85,16.475 ccw(c13.025,16.475) 13.025,15.3 cw(c13.025,15) 13.325,15 13.325,11.325 ccw(c14.975,11.325) 14.975,9.675 19.775,9.675 ccw(c19.775,11.225) 21.325,11.225 21.325,12.8 ccw(c20.25,12.8)
+1V35 on S1 (SIG) "+1V35_L01_P288" (solid, pour order 288): 16.826,84.458 16.826,80.851 ccw(c17.275,80.851) 17.275,80.401 22.9,80.401 ccw(c22.9,80.851) 23.35,80.851 23.35,85.801 ccw(c22.9,85.801) 22.9,86.251 17.25,86.251 ccw(c17.25,85.801) 16.8,85.801 16.8,84.676
GND on S1 (SIG) "GND_L01_P282" (solid, pour order 282): 18.279,79.061 19.39,79.061 cw(c19.39,78.712) 19.739,78.712 19.739,77.397 ccw(c20.235,77.397) 20.235,76.901 22.925,76.901 ccw(c22.925,77.347) 23.371,77.347 23.371,79.58 ccw(c22.89,79.58) 22.89,80.061 18.367,80.061 ccw(c18.367,79.768) 18.075,79.768 18.075,79.264 ccw(c18.279,79.264)
+1V0 on S1 (SIG) "+1V0_L01_P287" (solid, pour order 287): 16.826,54.502 16.826,50.895 ccw(c17.275,50.895) 17.275,50.445 22.9,50.445 ccw(c22.9,50.895) 23.35,50.895 23.35,55.845 ccw(c22.9,55.845) 22.9,56.295 17.25,56.295 ccw(c17.25,55.845) 16.8,55.845 16.8,54.72
+1V8 on S1 (SIG) "+1V8_L01_P286" (solid, pour order 286): 16.826,97.347 16.826,93.74 ccw(c17.275,93.74) 17.275,93.29 22.9,93.29 ccw(c22.9,93.74) 23.35,93.74 23.35,98.69 ccw(c22.9,98.69) 22.9,99.14 17.25,99.14 ccw(c17.25,98.69) 16.8,98.69 16.8,97.565